# Altium PCB LAPPA-2020.PcbDoc
Units mm, origin at the board's own origin, x right, y up, seen from the top; angles counter-clockwise.
Board outline 53 x 34 mm, 4 copper layers (Top, Ground Plane, Power Plane, Bottom), stack 0.983 mm thick; 75 components, 53 nets, 317 pads, 178 vias.
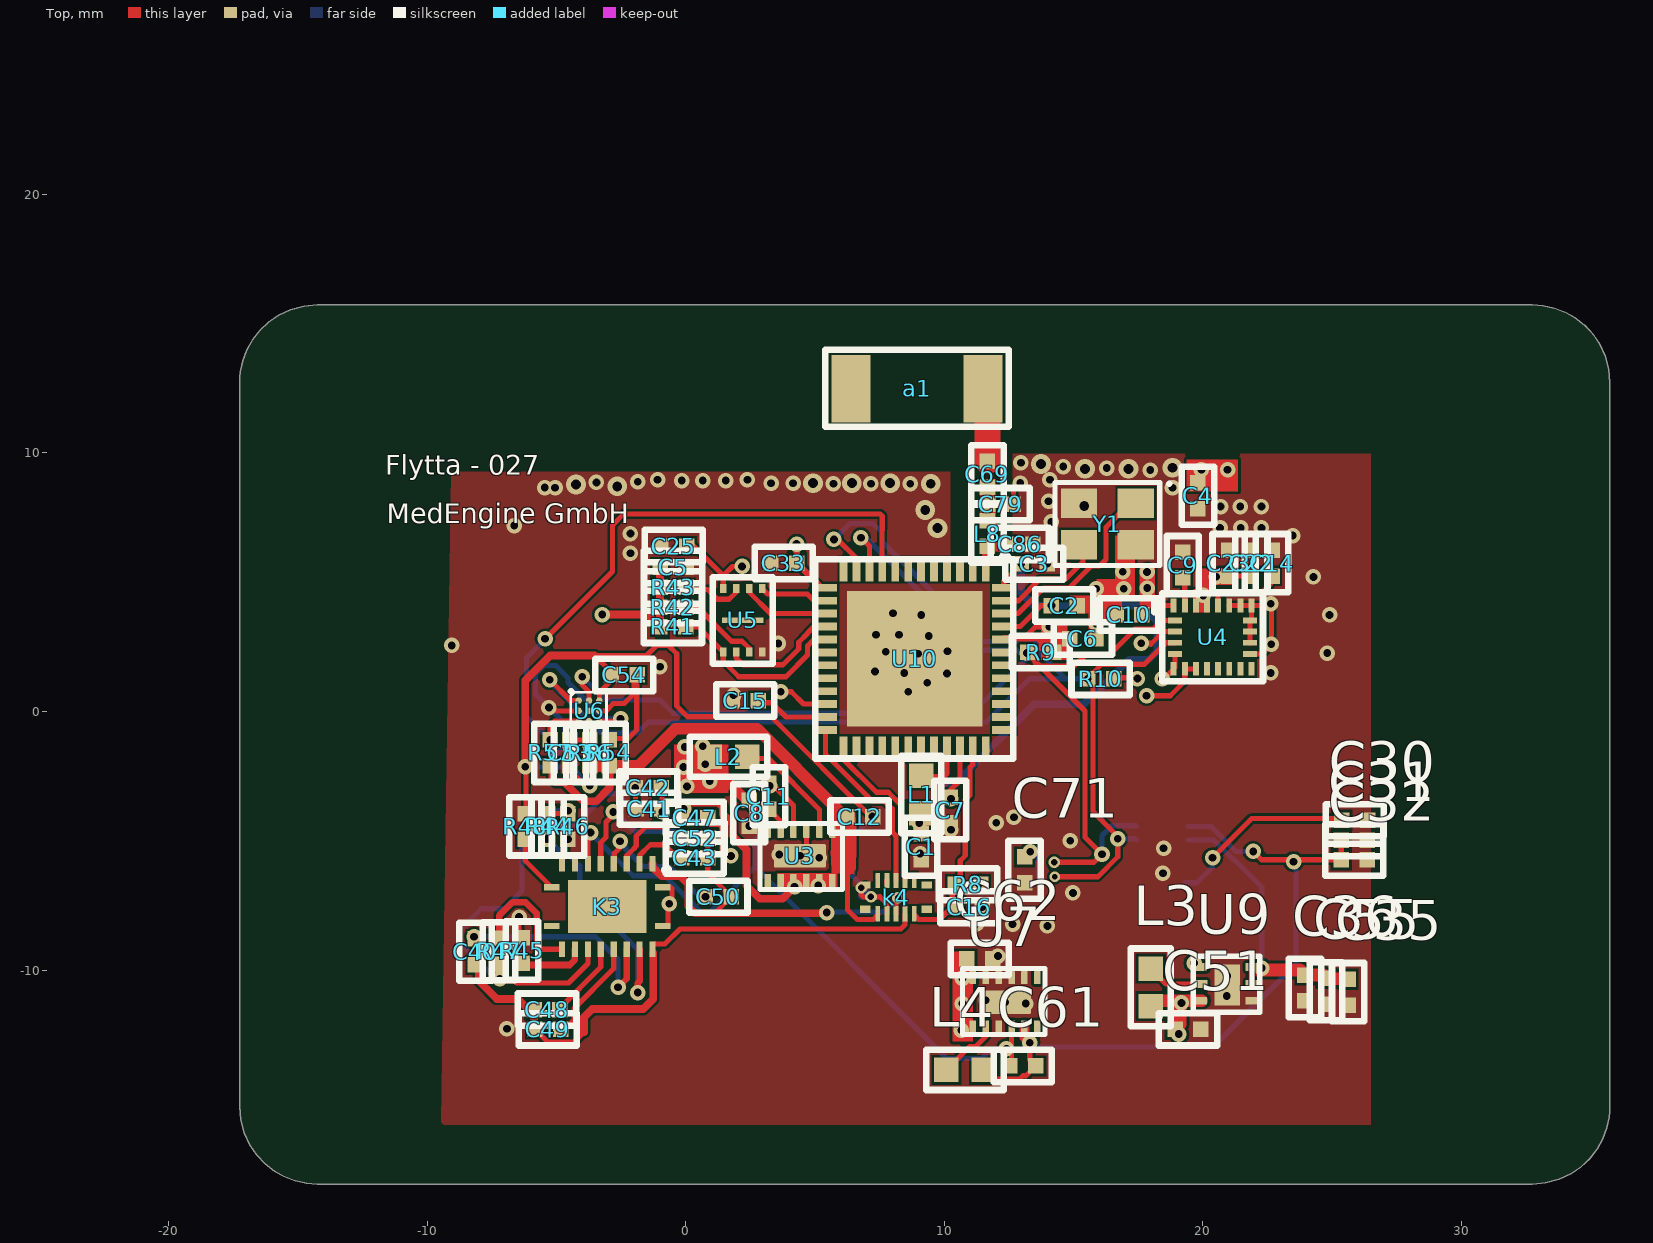
[diagram p0: Top view]
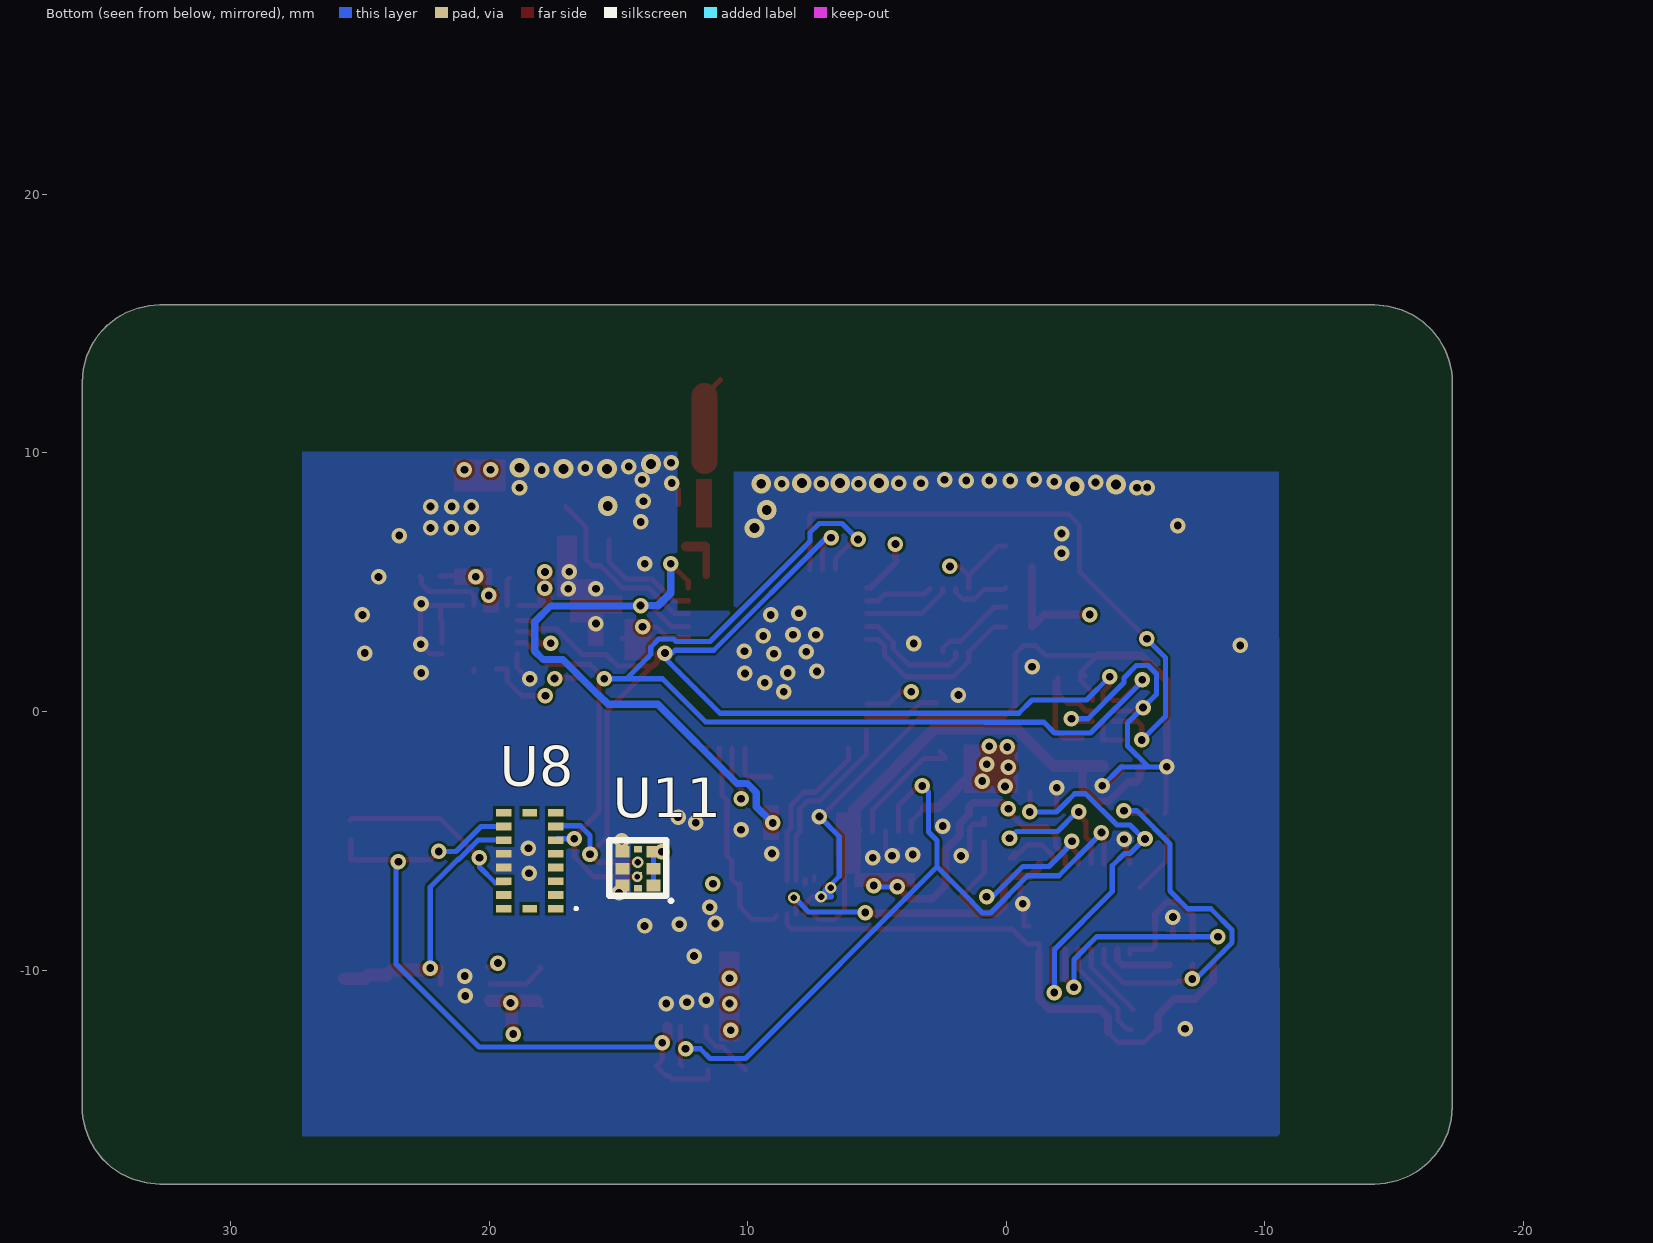
[diagram p1: Bottom view, seen from below]
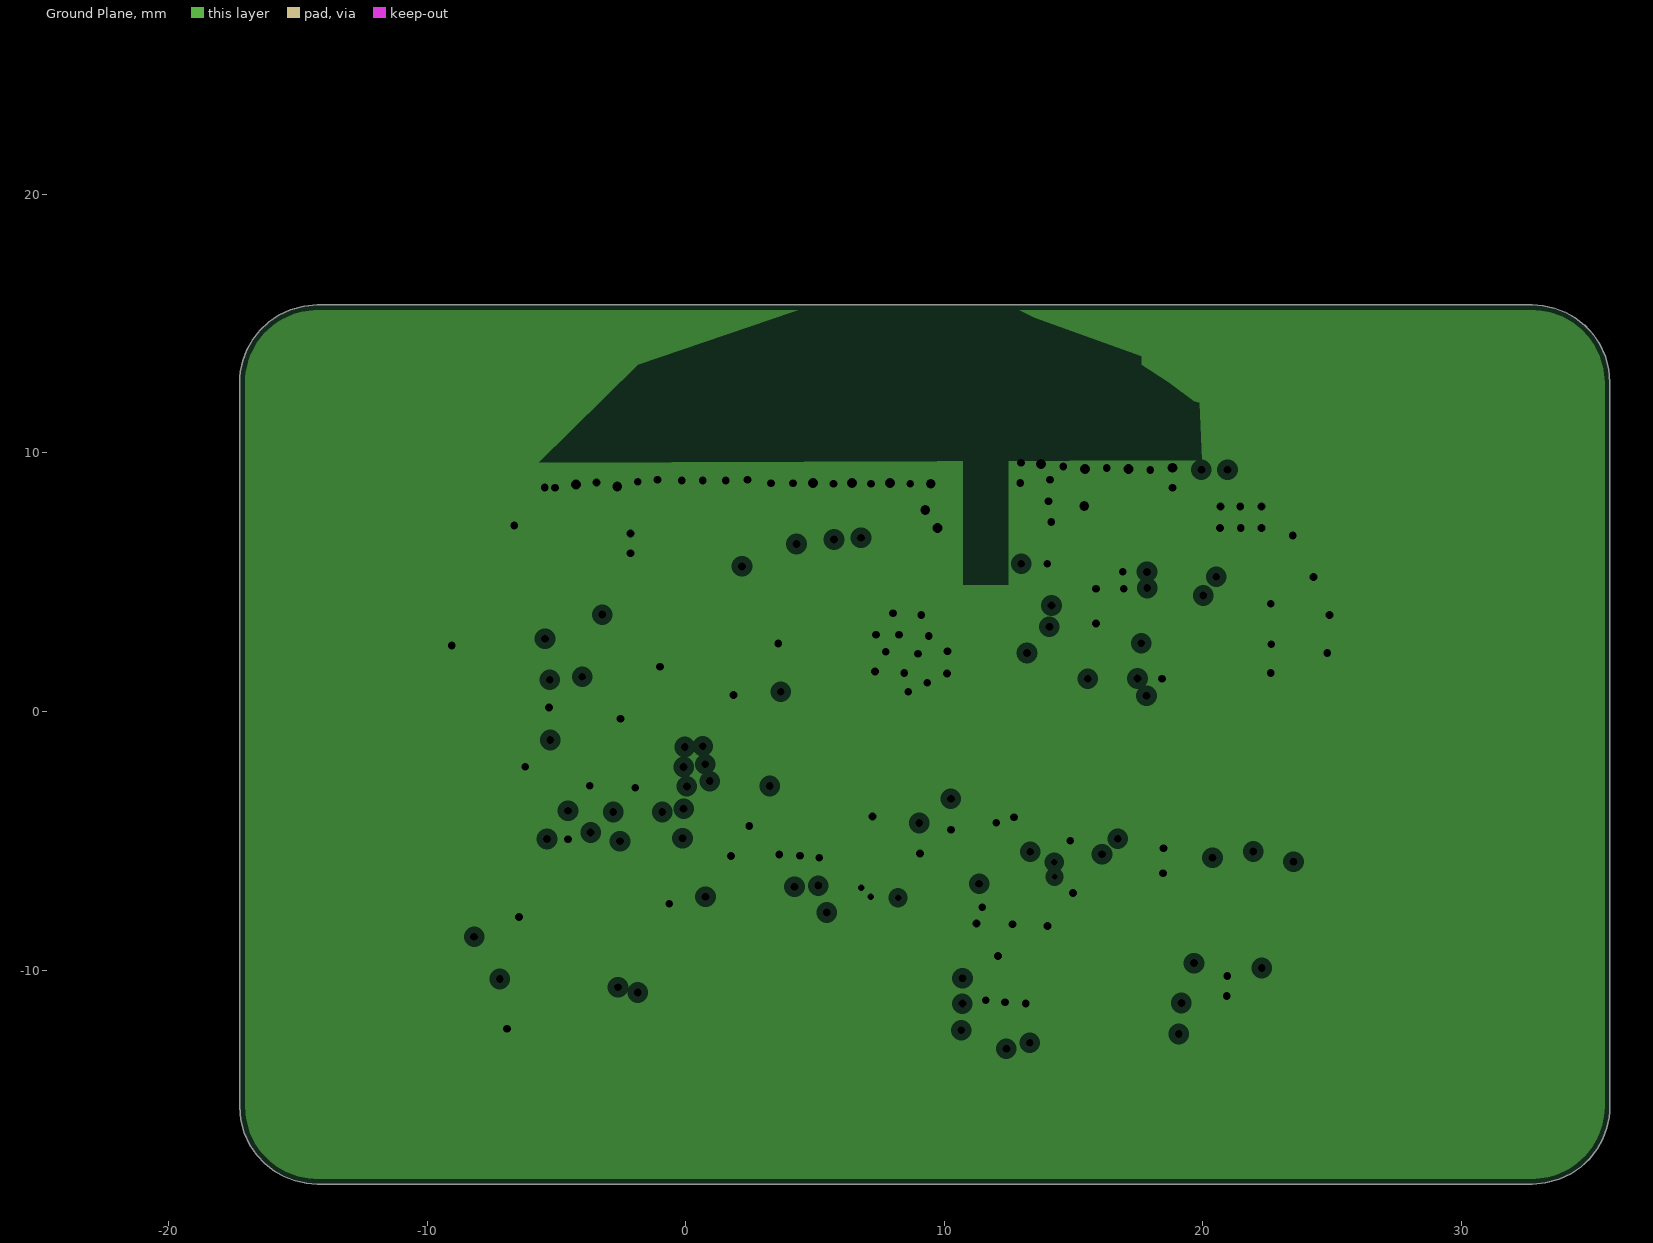
[diagram p2: Ground Plane, clearances drawn from the general rule]
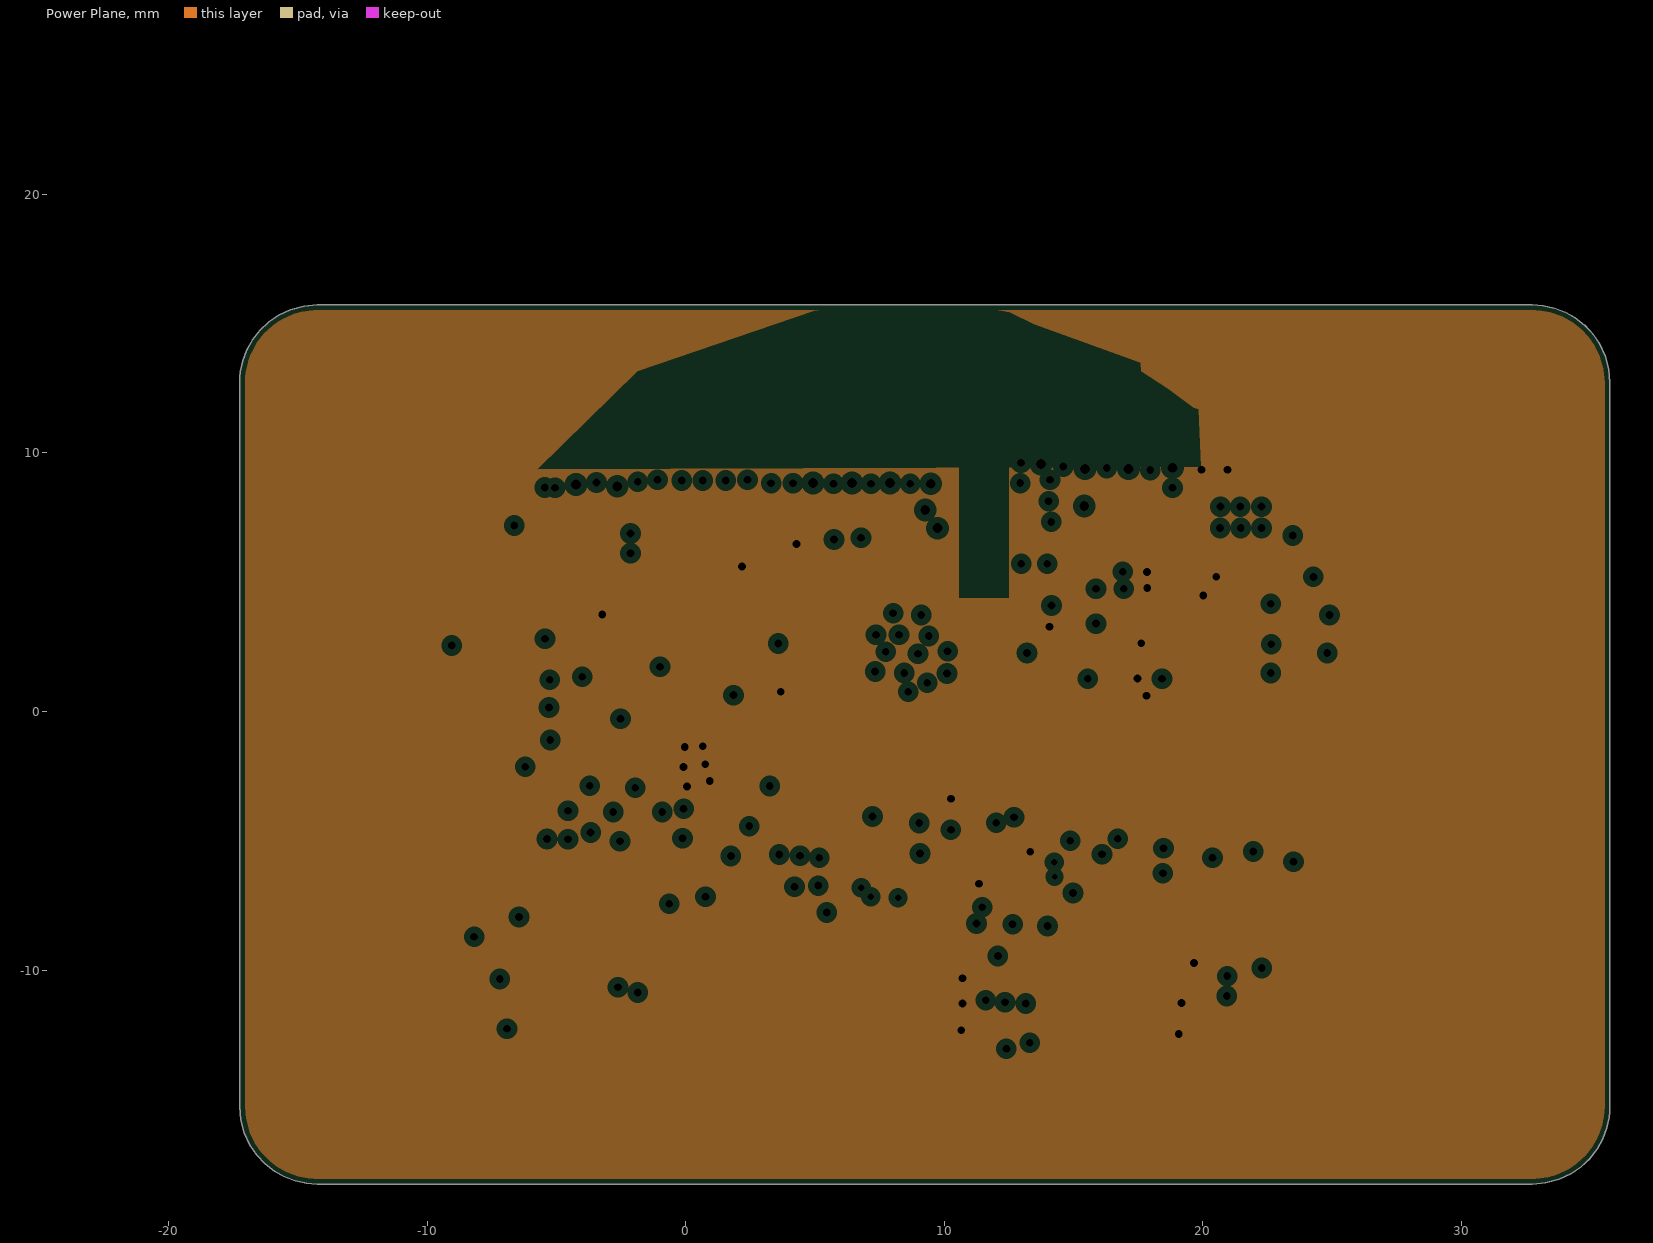
[diagram p3: Power Plane, clearances drawn from the general rule]
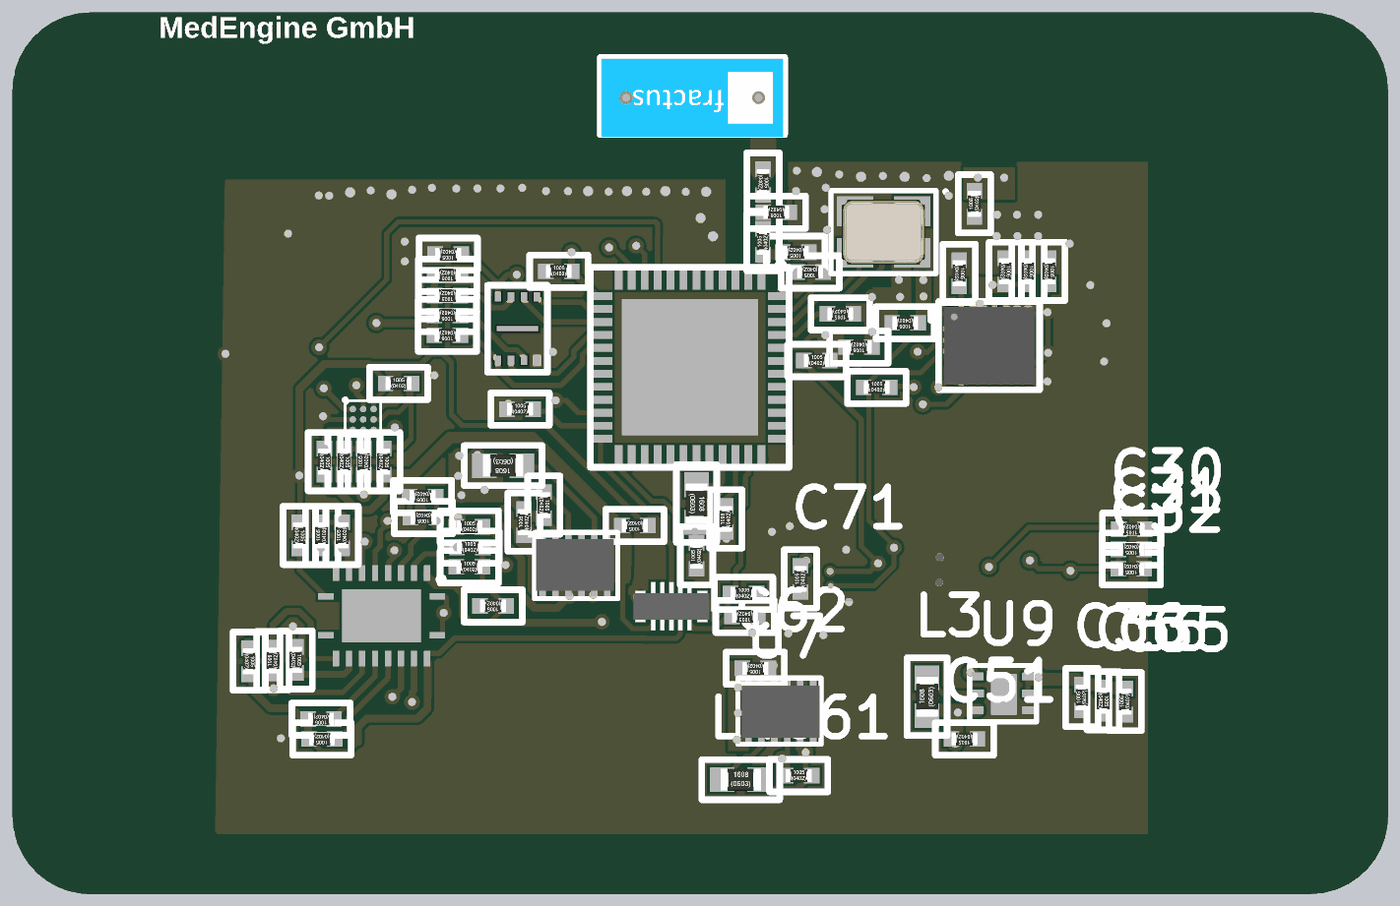
[diagram p4: 3D render of the assembled board from above, using the file's embedded part models]

## Layer stack, top to bottom
Top Solder: solder mask 0.0102, Solder Resist, Dk 3.5
Top: signal copper 0.0356
Dielectric 1: core 0.32, FR-4, Dk 4.4
Ground Plane: plane copper 0.036, net GND
Dielectric 3: prepreg 0.2, FR-4, Dk 4.4
Power Plane: plane copper 0.036, net VDD
Dielectric 4: core 0.32, FR-4, Dk 4.4
Bottom: signal copper 0.0356
Bottom Solder: solder mask 0.0102, Solder Resist, Dk 3.5

## Board outline
32.752,-18.276 -14.248,-18.276 -14.452,-18.269 -14.66,-18.247 -15.081,-18.158 -15.5,-18.002 -15.901,-17.779 -16.269,-17.492 -16.59,-17.151 -16.851,-16.767 -17.064,-16.31 -17.204,-15.787 -17.248,-15.276 -17.248,12.724 -17.241,12.928 -17.219,13.137 -17.129,13.558 -16.974,13.977 -16.751,14.378 -16.464,14.746 -16.123,15.066 -15.739,15.327 -15.282,15.54 -14.758,15.68 -14.248,15.724 32.752,15.724 32.956,15.717 33.165,15.696 33.586,15.606 34.005,15.45 34.406,15.227 34.774,14.941 35.094,14.599 35.355,14.216 35.568,13.758 35.709,13.235 35.752,12.724 35.752,-15.276 35.745,-15.48 35.724,-15.688 35.634,-16.109 35.478,-16.528 35.255,-16.93 34.969,-17.298 34.627,-17.618 34.244,-17.879 33.787,-18.092 33.263,-18.232

## Design rules (kind name [scope] priority, off if disabled: settings)
BoardOutlineClearance [OnLayer('Top')] p1: gap=0.25 ignorepadtopadclearanceinfootprint=FALSE except(0: Arc-SplitContinuation Track-SplitContinuation SMDPad-SplitContinuation THPad-SplitContinuation Via-SplitContinuation Fill-SplitContinuation Poly-SplitContinuation Region-SplitContinuation Text-SplitContinuation)
BoardOutlineClearance BoardOutlineClearance_1 [OnLayer('Bottom')] p2: gap=0.25 ignorepadtopadclearanceinfootprint=FALSE except(0: Arc-SplitContinuation Track-SplitContinuation SMDPad-SplitContinuation THPad-SplitContinuation Via-SplitContinuation Fill-SplitContinuation Poly-SplitContinuation Region-SplitContinuation Text-SplitContinuation)
Clearance [All] p1: gap=0.1 ignorepadtopadclearanceinfootprint=FALSE except(0: Arc-Hole Track-Hole SMDPad-Hole THPad-Hole Via-Hole Fill-Hole Poly-Hole Region-Hole Text-Hole; 0.15: THPad-THPad THPad-Via THPad-Fill THPad-Poly THPad-Region THPad-Text Text-Text)
ComponentClearance [All] p1: gap=0.25 collisioncheckmode=3 verticalgap=0.25 showdistances=FALSE
DiffPairsRouting [All] p1: maxlimit=0.25 minlimit=0.25 mostfreqgap=0.25 toplayer_minwidth=0.381 toplayer_maxwidth=0.381 toplayer_prefwidth=0.381 bottomlayer_minwidth=0.381 bottomlayer_maxwidth=0.381 bottomlayer_prefwidth=0.381 maxuncoupledlength=12.5
Height [All] p1: minheight=0 maxheight=25 prefheight=12.5
HoleSize HoleSize-PTH [All] p1: absolutevalues=TRUE maxlimit=2 minlimit=0.25 maxpercent=80.000 minpercent=20.000
HoleToHoleClearance [All] p1: gap=0.35 allowstackedmicrovias=TRUE
MinimumAnnularRing "Minimum IAR  >0.45mm" [((ObjectKind = 'Pad') OR (ObjectKind = 'Via')) And (Layer = 'MultiLayer') And (HoleDiameter > AsMM(0.45))] p1: minimumring=0.15 // minimum inner annular ring for pads > 0.45mm finished hole size
MinimumAnnularRing "Minimum IAR <=0.45mm" [((ObjectKind = 'Pad') OR (ObjectKind = 'Via')) And (Layer = 'MultiLayer') And (HoleDiameter <= AsMM(0.45))] p2: minimumring=0.15 // minimum inner annular ring for pads <= 0.45mm finished hole size
MinimumSolderMaskSliver [All] p1: minsoldermaskwidth=0.08
NetAntennae [All] p1 off: netantennaetolerance=0
PlaneClearance PlaneClearance-IPI [All] p1: clearance=0.25
PlaneConnect [All] p1: planeconnectstyle=Relief reliefexpansion=0.175 reliefentries=4 reliefconductorwidth=0.2 reliefairgap=0.2
PolygonConnect PolygonConnect-xTW [All] p1: connectstyle=Direct reliefconductorwidth=0.2 reliefentries=4 polygonreliefangle="90 Angle" airgapwidth=0.2
RoutingCorners [All] p1: cornerstyle=45-Degree minsetback=2.5 maxsetback=2.5
RoutingVias "RoutingVias > 0.45mm" [(ObjectKind = 'Via') And (HoleDiameter > AsMM(0.45))] p1: holewidth=0.5 width=0.85 viastyle="Through Hole" minholewidth=0.5 minwidth=0.85 maxholewidth=0.9 maxwidth=1.25 // finishet hole size > 0.45mm
RoutingVias "RoutingVias <= 0.45mm" [(ObjectKind = 'Via') And (HoleDiameter <= AsMM(0.45))] p2: holewidth=0.3 width=0.65 viastyle="Through Hole" minholewidth=0.25 minwidth=0.6 maxholewidth=0.45 maxwidth=0.8 // finishet hole size <= 0.45mm
ShortCircuit ShortCircuit_1 [InNet('NetAE1_1') vs InNet('GND')] p1: allowed=TRUE
ShortCircuit [All] p2: allowed=FALSE
SilkToSilkClearance [All] p1: silktosilkclearance=0.2
SilkToSolderMaskClearance SilkscreenOverComponentPads [IsPad] p1 off: minsilkscreentomaskgap=0.3 clearancetoexposedcopper=TRUE
SolderMaskExpansion [All] p1: expansion=0 istentingtop=FALSE
UnRoutedNet [All] p1: checkbadconnections=TRUE
Width Width-xTW [All] p1: maxlimit=1.5 minlimit=0.15 preferedwidth=0.2
16 further rules are at their usual default settings.

## Components (designator, comment, footprint, x,y, rotation, side; value= is the part's Value field where it differs from the comment)
a1 "fractus-slim-extend" fractus-chip-antenna 8.952,12.487 r180 top
C1 "10UF" "Passive (0402, 1005)" 9.109,-5.232 r90 top
C2 "100NF" "Passive (0402, 1005)" 14.65,4.098 r180 top
C3 "100NF" "Passive (0402, 1005)" 13.487,5.715 r180 top
C4 "22UF" "Passive (0402, 1005)" 19.818,8.344 r90 top
C5 "100NF" "Passive (0402, 1005)" -0.483,5.588 r180 top
C6 "100NF" "Passive (0402, 1005)" 15.367,2.819 r180 top
C7 "10UF" "Passive (0402, 1005)" 10.236,-3.81 r90 top
C8 "100NF" "Passive (0402, 1005)" 2.464,-3.929 r90 top
C9 "100NF" "Passive (0402, 1005)" 19.228,5.664 r270 top
C10 "100NF" "Passive (0402, 1005)" 17.15,3.75 r180 top
C11 "10UF" "Passive (0402, 1005)" 3.226,-3.277 r270 top
C12 "10UF" "Passive (0402, 1005)" 6.731,-4.064 r180 top
C14 "10NF" "Passive (0402, 1005)" 22.682,5.74 r270 top
C15 "1UF" "Passive (0402, 1005)" 2.311,0.425 r0 top
C16 "100NF" "Passive (0402, 1005)" 10.973,-7.569 r180 top
C22 "100NF" "Passive (0402, 1005)" 21.882,5.74 r270 top
C23 "10UF" "Passive (0402, 1005)" 21.006,5.74 r270 top
C25 "100NF" "Passive (0402, 1005)" -0.457,6.401 r180 top
C30 "1UF" "Passive (0402, 1005)" 25.879,-4.207 r180 top
C31 "0.1UF" "Passive (0402, 1005)" 25.863,-4.978 r180 top
C32 "4.7UF" "Passive (0402, 1005)" 25.863,-5.733 r180 top
C33 "100NF" "Passive (0402, 1005)" 3.802,5.74 r0 top
C35 "0.1UF" "Passive (0402, 1005)" 25.627,-10.853 r90 top
C36 "10UF" "Passive (0402, 1005)" 23.957,-10.695 r90 top
C40 "0.01UF" "Passive (0402, 1005)" -8.128,-9.296 r270 top
C41 "0.022UF" "Passive (0402, 1005)" -1.412,-3.759 r180 top
C42 "4.7UF" "Passive (0402, 1005)" -1.448,-2.946 r180 top
C43 "0.01UF" "Passive (0402, 1005)" 0.356,-5.658 r0 top
C47 "4.7UF" "Passive (0402, 1005)" 0.356,-4.115 r0 top
C48 "0.022UF" "Passive (0402, 1005)" -5.359,-11.532 r180 top
C49 "0.47UF" "Passive (0402, 1005)" -5.326,-12.294 r180 top
C50 "0.47UF" "Passive (0402, 1005)" 1.27,-7.163 r180 top
C51 "2.2UF" "Passive (0402, 1005)" 19.433,-12.294 r180 top
C52 "0.022UF" "Passive (0402, 1005)" 0.381,-4.902 r0 top
C53 "10NF" "Passive (0402, 1005)" -4.47,-1.6 r270 top
C54 "1UF" "Passive (0402, 1005)" -2.37,1.416 r0 top
C55 "4.7UF" "Passive (0402, 1005)" 24.775,-10.817 r270 top
C61 "10UF" "Passive (0402, 1005)" 13.046,-13.707 r0 top
C62 "10UF" "Passive (0402, 1005)" 11.375,-9.569 r180 top
C69 "12pF" "Passive (0402, 1005)" 11.674,9.18 r270 top
C71 "6.8PF" "Passive (0402, 1005)" 13.112,-6.121 r90 top
C79 "1pF" "Passive (0402, 1005)" 12.182,8.019 r180 top
C86 "6.8PF" "Passive (0402, 1005)" 12.932,6.476 r180 top
K3 "BQ51051 - VQFN" "bq51051 - vqfn" -3.196,-7.555 r270 top
k4 "BM15FR0.8-10DP-0.35V(53)" BM15-Header 8.052,-7.163 r0 top
L1 "10uH" "Passive (0603, 1608)" 9.109,-3.215 r270 top value=10mH
L2 "10uH" "Passive (0603, 1608)" 1.657,-1.753 r180 top value=10mH
L3 "1UH" "Passive (0603, 1608)" 17.993,-10.666 r90 top value=10mH
L4 "10uH" "Passive (0603, 1608)" 10.814,-13.863 r0 top value=10mH
L8 "2nH" "Passive (0402, 1005)" 11.674,6.883 r90 top value=10mH
R8 "102K" "Passive (0402, 1005)" 10.922,-6.68 r0 top
R9 "4.7K" "Passive (0402, 1005)" 13.741,2.3 r0 top
R10 "4.7K" "Passive (0402, 1005)" 16.053,1.264 r0 top
R41 "2.2K" "Passive (0402, 1005)" -0.49,3.275 r180 top
R42 "2.2K" "Passive (0402, 1005)" -0.49,4.039 r180 top
R43 "2.2K" "Passive (0402, 1005)" -0.483,4.801 r180 top
R44 "100K" "Passive (0402, 1005)" -5.334,-4.445 r90 top
R45 "10K" "Passive (0402, 1005)" -6.325,-9.246 r270 top
R46 "140" "Passive (0402, 1005)" -4.549,-4.445 r90 top
R47 "3.83K" "Passive (0402, 1005)" -7.214,-9.271 r90 top
R48 "2.43K" "Passive (0402, 1005)" -6.198,-4.445 r270 top
R54 "1K" "Passive (0402, 1005)" -2.946,-1.6 r270 top
R56 "150" "Passive (0402, 1005)" -3.709,-1.6 r90 top
R57 "4.7K" "Passive (0402, 1005)" -5.232,-1.6 r270 top
U3 "TPS6274X" TPS6274 4.424,-5.583 r270 top
U4 "LSM9DS1" LSM9DS1 20.383,2.875 r0 top
U5 "W25X40CLUXIGCT-ND" "USON 2x3" 1.46,2.306 r90 top
U6 "MAX17043" MAX17043 -4.134,0.425 r0 top
U7 "TPS6274X" TPS6274 12.357,-11.245 r90 top
U8 "MAX86160" MAX86160 18.452,-5.753 r0 bottom
U9 "TPS61241" TPS61241 33.432,-8.099 r180 top
U10 "CC2640R2FRGZR" CC2640R2FRGZR 8.897,1.882 r270 top
U11 "MAX30208" MAX30208 13.652,-6.73 r0 bottom
Y1 "24MHz crystal" TSX-3225 17.415,8.052 r180 top

## Footprints (in the part's own frame and the unit in brackets; to place one, negate y for a bottom-side part, rotate by r counter-clockwise, add the part's x,y. Pads: shape width x height; smd on the part's side, far side on the other; paste and mask are expansions set on the pad)
BM15-Header [mm]
  rect 0.18x0.59 smd: 1(-0.613,-0.664) 2(-0.613,0.626) 3(-0.263,-0.664) 4(-0.263,0.626) 5(0.087,-0.664) 6(0.087,0.626) 7(0.437,-0.664) 8(0.437,0.626) 9(0.787,-0.664) 10(0.787,0.626)
  rect 0.415x0.28 smd: 11(-1.105,0.451) 12(-1.105,-0.489) 13(1.279,-0.489) 14(1.279,0.451)
  body extent -1.37,-0.94 1.55,0.9, height 0.82
"bq51051 - vqfn" [mm]
  rect 0.24x0.6 smd: 1(-0.76,2.318) 10(-0.76,-1.982) 11(0.74,-1.982) 20(0.74,2.318)
  rect 0.6x0.24 smd: 2(-1.66,1.918) 3(-1.66,1.418) 4(-1.66,0.918) 5(-1.66,0.418) 6(-1.66,-0.082) 7(-1.66,-0.582) 8(-1.66,-1.082) 9(-1.66,-1.582) 12(1.64,-1.582) 13(1.64,-1.082) 14(1.64,-0.582) 15(1.64,-0.082) 16(1.64,0.418) 17(1.64,0.918) 18(1.64,1.418) 19(1.64,1.918)
  rect 2.05x3.05 smd: 21(-0.01,0.168)
  silkscreen extent -1.53,2.35 -1.33,2.57, body extent -2.11,-2.46 2.06,2.76, height 0.52
CC2640R2FRGZR [mm]
  rect 0.9x0.3 smd: 1(-3.605,2.713) 2(-3.605,2.213) 3(-3.605,1.713) 4(-3.605,1.213) 5(-3.605,0.713) 6(-3.605,0.213) 7(-3.605,-0.287) 8(-3.605,-0.787) 9(-3.605,-1.287) 10(-3.605,-1.787) 11(-3.605,-2.287) 12(-3.605,-2.787) 25(3.295,-2.787) 26(3.295,-2.287) 27(3.295,-1.787) 28(3.295,-1.287) 29(3.295,-0.787) 30(3.295,-0.287) 31(3.295,0.213) 32(3.295,0.713) 33(3.295,1.213) 34(3.295,1.713) 35(3.295,2.213) 36(3.295,2.713)
  rect 0.3x0.9 smd: 13(-2.905,-3.487) 14(-2.405,-3.487) 15(-1.905,-3.487) 16(-1.405,-3.487) 17(-0.905,-3.487) 18(-0.405,-3.487) 19(0.095,-3.487) 20(0.595,-3.487) 21(1.095,-3.487) 22(1.595,-3.487) 23(2.095,-3.487) 24(2.595,-3.487) 37(2.595,3.413) 38(2.095,3.413) 39(1.595,3.413) 40(1.095,3.413) 41(0.595,3.413) 42(0.095,3.413) 43(-0.405,3.413) 44(-0.905,3.413) 45(-1.405,3.413) 46(-1.905,3.413) 47(-2.405,3.413) 48(-2.905,3.413)
  rect 5.25x5.25 smd: 49(-0.155,-0.037)
  silkscreen extent -4.18,-3.88 3.7,3.78, body extent -3.32,-3.33 3.22,3.21, height 0.5
fractus-chip-antenna [mm]
  rect 1.5x2.6 smd: 1(-2.55,0) 2(2.55,0)
  silkscreen extent -3.55,-1.5 3.55,1.48, body extent -3.5,-1.45 3.5,2.01, height 2.2
LSM9DS1 [mm] "LGA 24 Pin"
  rect 0.23x0.53 smd mask+0.05: 1(-1.505,1.225) 6(-1.505,-1.225) 7(-1.075,-1.225) 8(-0.645,-1.225) 9(-0.215,-1.225) 10(0.215,-1.225) 11(0.645,-1.225) 12(1.075,-1.225) 13(1.505,-1.225) 18(1.505,1.225) 19(1.075,1.225) 20(0.645,1.225) 21(0.215,1.225) 22(-0.215,1.225) 23(-0.645,1.225) 24(-1.075,1.225)
  rect 0.53x0.23 smd mask+0.05: 2(-1.45,0.645) 3(-1.45,0.215) 4(-1.45,-0.215) 5(-1.45,-0.645) 14(1.45,-0.645) 15(1.45,-0.215) 16(1.45,0.215) 17(1.45,0.645)
  silkscreen extent -2.25,-1.7 1.95,1.7, body extent -2.7,-1.5 1.75,1.55, height 0.87
MAX17043 [mm]
  round 0.25 smd mask+0: A1(0,0) A2(0.4,0) A3(0.8,0) B1(0,-0.4) B2(0.4,-0.4) B3(0.8,-0.4) C1(0,-0.8) C2(0.4,-0.8) C3(0.8,-0.8)
  silkscreen extent -0.3,-1.05 1.07,0.36, body extent -0.3,-1.05 1.07,0.35, height 0.51
MAX30208 [mm]
  rect 0.55x0.45 smd mask+0.05: 1(0,0) 2(0,-1.3) 3(0,-0.65) 4(1.2,-1.3) 5(1.2,-0.65) 6(1.2,0)
  rect 0.3x0.25 smd mask+0.05: 7(0.6,0.1) 8(0.6,-0.4) 9(0.6,-0.9) 10(0.6,-1.4)
  silkscreen extent -0.69,-1.75 1.7,0.59, body extent -0.49,-1.75 1.7,0.4, height 0.5
MAX86160 [mm]
  rect 0.6x0.3 smd: 1(-1.012,1.872) 2(-1.012,1.342) 3(-1.012,0.812) 4(-1.012,0.282) 5(-1.012,-0.248) 6(-1.012,-0.778) 7(-1.012,-1.308) 8(-1.012,-1.838) 10(0.988,-1.838) 11(0.988,-1.308) 12(0.988,-0.778) 13(0.988,-0.248) 14(0.988,0.282) 15(0.988,0.812) 16(0.988,1.342) 17(0.988,1.872)
  rect 0.55x0.3 smd: 9(-0.012,-1.838) 18(-0.012,1.872)
  silkscreen extent -1.86,1.82 -1.76,1.92, body extent -1.41,-2.13 1.39,2.17, height 1.65
"Passive (0402, 1005)" [mm]
  rect 0.6x0.6 smd: 1(-0.5,0) 2(0.5,0)
  silkscreen extent -1.12,-0.63 1.12,0.63, body extent -0.5,-0.25 0.5,0.25, height 0.35
"Passive (0603, 1608)" [mm]
  rect 0.95x0.95 smd: 1(-0.725,0) 2(0.725,0)
  silkscreen extent -1.5,-0.77 1.5,0.77, body extent -0.78,-0.43 0.77,0.42, height 0.45
TPS6274 [mm] "STEP DOWN CONVERTER"
  rrect10% 0.5x0.25 smd paste+0 mask+0: 1(-0.95,1.25) 2(-0.95,0.75) 3(-0.95,0.25) 4(-0.95,-0.25) 5(-0.95,-0.75) 6(-0.95,-1.25) 7(0.95,-1.25) 8(0.95,-0.75) 9(0.95,-0.25) 10(0.95,0.25) 11(0.95,0.75) 12(0.95,1.25)
  rrect10% 0.9x2 smd paste+0 mask+0: 3(0,0)
  silkscreen extent -1.25,-1.55 1.3,1.65, body extent -1,-1.5 1,1.5, height 0.8
TPS61241 [mm]
  rrect10% 0.45x0.3 smd paste+0 mask+0: 1(11.55,3.087) 2(11.55,2.437) 3(11.55,1.783) 4(13.48,1.783) 5(13.47,2.436) 6(13.48,3.087)
  rrect10% 1x1.6 smd paste+0 mask+0: 7(12.482,2.481)
  silkscreen extent 11.22,1.36 13.8,3.53, body extent 11.52,1.45 13.52,3.42, height 0.25
TSX-3225 [mm] "Epson TSX-3225 24MHz Crystal"
  rect 1.4x1.15 smd: 1(0,0) 2(2.2,0) 3(2.2,1.6) 4(0,1.6)
  silkscreen extent -1.3,-0.8 3.13,2.4, body extent -0.5,-0.45 2.7,2.05, height 0.6
"USON 2x3" [mm] "For Winbond W25X40CLUXIGCT-ND"
  rect 0.35x0.25 smd mask+0.05: 1(0,0) 2(0,-0.5) 3(0,-1) 4(0,-1.5) 5(2.45,-1.5) 6(2.45,-1) 7(2.45,-0.5) 8(2.45,0)
  rect 0.2x1.6 smd mask+0.05: 10(1.225,-0.75)
  silkscreen extent -0.46,-1.91 2.9,0.41, body extent -0.33,-1.78 2.77,0.28, height 0.55

## Part data
a1: library part fractus-chip-antenna, "fractus ti chip antenna"
C1 C2 C3 C4 C5 C6 C7 C8 C9 C10 C11 C12 C14 C15 C16 C22 C23 C25 C30 C31 C32 C33 C35 C36 C40 C41 C42 C43 C47 C48 C49 C50 C51 C52 C53 C54 C55 C61 C62 C69 C71 C79 C86: library part Capacitor, "Ceramic chip capacitor"
k4: library part bm15
L1 L2 L3 L4 L8: library part Inductor, "Inductor", Code_IEC=1005, Code_JEITA=0402, LatestRevisionDate=29-May-2009, LatestRevisionNote="IPC-7351 Footprint Added.", PackageDescription="Chip Inductor", PackageReference=0402-A, Published=8-Jun-2000, Publisher="Altium Limited"
R8 R9 R10 R41 R42 R43 R44 R45 R46 R47 R48 R54 R56 R57: library part Resistor, "Resistor"
U3 U7: "Step down converter"
U4: "9DOF, Accel, Gyro, Mag", Package="QFN-20 Microchip", Availability=Good, MF=Microchip, MP=MCP73871-3CAI/ML, Price="1.56 USD"
U6: "I2C battery gauge"
Y1: library part TSX-3225

## Via types
v1: diameter 0.6, hole 0.3, Top to Bottom, tented both sides, 160 vias
v2: diameter 0.762, hole 0.381, Top to Bottom, tented both sides, 13 vias
v3: diameter 0.45, hole 0.25, Top to Bottom, tented both sides, 4 vias
v4: diameter 0.4, hole 0.2, Top to Bottom, tented both sides, 1 vias

## Nets (pads, with @x,y where several pads share a name; then routed paths per layer and width w, separated by ;. In a path a pad name is that pad's centre, name@x,y a point inside that pad or via, vN(x,y) a via of type N, cw(c..) or ccw(c..) an arc to the next point about the centre after c; other vN are vias at no path point)
1V8: C31.2 C32.2 C61.2 L4.2 U7.5 U8.11 | length 27.1
  Top w0.2: L4.2 11.539,-14.207 12.929,-14.207 13.046,-14.09 13.163,-14.09 C61.2 13.312,-13.474 v1(13.312,-12.812) v1@13.107,-12.607 ; v1(21.954,-5.414) 22.274,-5.733 C32.2 C31.2
  Top w0.4: v1@13.107,-12.607 U7.5
  Bottom w0.2: v1(13.312,-12.812) 13.476,-12.975 20.398,-12.975 23.605,-9.768 v1@23.605,-5.827 ; U8.11 20.325,-4.445 21.293,-5.414 v1(21.954,-5.414)
  other v1: 23.514,-5.807
3V3_PG: U3.7
3V3_SCLK: R9.1 U4.2 U6.A2 U8.7 U10.10 U11.9 | length 49.8
  Top w0.2: v1(-3.999,1.345) -3.999,1.027 -3.734,0.762 U6.A2 ; v1(6.782,6.724) 7.109,6.396 U10.10 ; R9.1@13.041,2.1 R9.1 13.241,2.226 13.51,1.957 ; R9.1@13.288,2.253 13.391,2.356 13.51,2.237 13.51,1.957 ; v3(14.252,-5.83) 15.801,-5.83 v1(16.106,-5.525) ; v1@16.11,-5.521 15.453,-4.864 15.453,0.014 13.707,1.76 ; U4.2@18.933,3.518 18.416,3.518 18.09,3.192 17.392,3.192 16.408,2.208 15.483,2.208 15.035,1.76 13.707,1.76 ; 13.51,1.957 13.51,1.901 13.651,1.76 13.707,1.76 ; 13.51,1.957 13.707,1.76
  Bottom w0.2: v1(-3.999,1.345) -3.103,0.448 -2.092,0.448 ; -2.091,0.448 -0.991,0.448 -0.476,-0.067 11.083,-0.067 v1@13.208,2.058 ; v1@6.629,6.731 6.96,6.731 11.322,2.369 12.816,2.369 v1@13.108,2.077 ; v1(16.106,-5.525) 16.106,-4.796 16.483,-4.419 17.414,-4.419 U8.7
  other v1: 13.208,2.261
3V3_SDA: R10.1 U4.4 U6.A1 U8.6 U10.11 U11.8 | length 52.4
  Top w0.2: v1(-5.252,1.225) -4.452,0.425 U6.A1 ; v1(5.74,6.655) 5.88,6.655 6.609,5.926 U10.11 ; v4(14.276,-6.391) 15.947,-6.391 16.717,-5.621 v1(16.717,-4.919) ; R10.1@15.491,1.203 v1(15.553,1.264) 15.753,1.064 15.753,-3.87 v1@16.563,-4.68 ; R10.1@15.55,1.275 16.1,1.825 17.004,1.825 ; 17.05,1.825 17.004,1.825 ; U4.4 18.583,2.658 17.75,1.825 17.004,1.825
  Bottom w0.2: v1(-5.252,1.225) -5.252,1.166 -3.256,-0.829 -1.861,-0.829 -1.449,-0.417 0.833,-0.417 0.843,-0.407 11.626,-0.407 13.298,1.264 14.698,1.264 ; v1(5.74,6.655) 6.361,7.276 7.238,7.276 7.603,6.911 7.603,6.572 7.926,6.25 7.926,6.246 11.462,2.709 12.777,2.709 12.879,2.811 13.436,2.811 13.758,2.488 13.758,2.205 14.698,1.264 ; v1(15.553,1.264) 14.698,1.264 ; v1(16.717,-4.919) 17.384,-4.919 U8.6
5V: C35.2 C36.2 C55.1 U8.12 U9.2 U9.3 | length 11.3
  Top w0.2: U9.2@21.872,-10.533 21.877,-10.528 21.877,-9.887 U9.3 21.957,-9.882 U9.3@22.07,-9.995 ; C36.2@23.757,-9.995 C36.2 ; C55.1@24.676,-10.195 C55.1@24.816,-10.335 ; C35.2@25.609,-10.335 C35.2
  Top w0.5: U9.3@22.07,-9.995 C36.2@23.757,-9.995 ; C36.2 C55.1@24.676,-10.195 ; C55.1@24.816,-10.335 C35.2@25.609,-10.335
  Bottom w0.2: U8.12 20.431,-4.975 21.169,-5.714 21.213,-5.714 22.286,-6.786 v1(22.286,-9.921)
AC1: C43.2 C50.1 C52.2 K3.2 k4.5 | length 15.3
  Top w0.2: C52.2@0.856,-5.029 C43.2 0.856,-6.248 C50.1 1.127,-7.806 1.118,-7.815 1.118,-7.806 ; k4.5@8.14,-7.826 8.14,-7.202 8.145,-7.197 v3(8.218,-7.197)
  Top w0.3: K3.2 -1.278,-6.015 -0.918,-6.375 -0.205,-6.375 0.102,-6.681 0.102,-7.545 0.363,-7.806 1.118,-7.806 1.127,-7.806 v1@5.461,-7.806
  Bottom w0.2: v1(5.461,-7.775) 5.486,-7.75 7.645,-7.75 8.198,-7.197 v3(8.218,-7.197)
AC2: C40.2 C48.2 C49.2 K3.19 k4.7 | length 22.2
  Top w0.198: 8.323,-8.415 8.489,-8.25 k4.7
  Top w0.2: C49.2 -5.326,-12.794 -4.316,-12.794 -3.929,-12.407 ; K3.19 -1.278,-9.015 -1.258,-8.995 -0.805,-8.995 -0.219,-8.409 5.317,-8.409 8.323,-8.415
  Top w0.3: C40.2@-8.001,-9.796 -8.001,-10.414 -7.299,-11.116 -6.487,-11.116 -5.859,-11.743 C49.2@-5.859,-12.327 ; -3.929,-12.407 -3.929,-11.829 -3.607,-11.506 -1.641,-11.506 -1.254,-11.12 -1.254,-10.668 -1.249,-10.664 K3.19@-1.249,-9.345
BOOT1: C43.1 K3.3 | length 2.6
  Top w0.2: K3.3 -1.778,-5.572 -1.363,-5.156 -0.819,-5.156 -0.317,-5.658 C43.1 C43.1@-0.35,-5.452
BOOT2: C40.1 K3.17 | length 8.6
  Top w0.254: v1(-2.61,-10.668) -2.278,-10.336 K3.17
  Bottom w0.2: v1(-8.179,-8.712) -8.177,-8.714 -6.173,-8.714 -6.172,-8.712 -3.489,-8.712 -2.61,-9.591 v1(-2.61,-10.668)
CHG: C11.1 C61.1 K3.7 U3.4 U7.4 | length 29.5
  Top w0.2: K3.7 -3.778,-4.896 -3.672,-4.79 v1(-3.672,-4.682) ; v1(3.251,-2.878) 3.419,-2.878 4.174,-3.633 U3.4 ; C61.1 12.607,-13.646 U7.4
  Bottom w0.2: v1@-3.48,-4.893 -2.022,-6.35 -0.821,-6.35 0.618,-7.789 0.922,-7.789 1.32,-7.391 1.32,-7.367 2.681,-6.006 ; v1(3.251,-2.878) 3.014,-3.115 3.014,-4.66 2.681,-4.993 2.681,-6.006 ; v1(12.409,-13.046) 11.84,-13.046 11.464,-13.423 10.098,-13.423 2.681,-6.006
CLMP1: C50.2 K3.5 | length 5.3
  Top w0.2: K3.5 -2.758,-5.875 -2.758,-5.495 -2.533,-5.27 v1(-2.533,-5.022)
  Bottom w0.2: v1@-2.537,-5.058 -2.311,-5.283 -2.362,-5.283 -1.651,-5.994 -0.635,-5.994 0.533,-7.163 v1(0.77,-7.163)
CLMP2: C49.1 K3.16 | length 4
  Top w0.2: C49.1 -4.682,-12.294 -4.319,-11.931 -4.319,-11.482 -2.778,-9.941 K3.16
COM1: C52.1 K3.6 | length 5.3
  Top w0.2: K3.6 -3.278,-5.066 -3.073,-4.861 -3.073,-4.274 -2.769,-3.969 -2.794,-3.944 v1(-2.794,-3.886)
  Bottom w0.2: v1@-2.737,-3.87 -1.971,-4.636 -0.385,-4.636 v1(-0.119,-4.902)
COM2: C48.1 K3.15 | length 3.1
  Top w0.2: C48.1@-4.92,-11.532 C48.1 -4.859,-11.463 -3.278,-9.882 K3.15
DCDC_SW: L1.1 U10.33 | length 2
  Top w0.2: L1.1@9.109,-2.526 9.983,-2.526 10.109,-2.4 U10.33
FLASH_CS: R41.1 U5.1 U10.17 | length 7.2
  Top w0.2: R41.1 0.49,3.275 U5.1 1.46,1.945 2.059,1.346 3.881,1.346 4.719,2.184 4.719,2.536 4.86,2.676 4.964,2.781 U10.17@5.409,2.781
FLASH_MISO: U5.2 U10.16 | length 4.6
  Top w0.2: U5.2 1.96,2.075 2.225,1.81 3.768,1.81 4.379,2.421 4.379,2.677 4.719,3.016 4.719,3.036 4.97,3.286 U10.16
FLASH_MOSI: U5.5 U10.14 | length 2.6
  Top w0.2: U5.5 3.169,4.547 4.496,4.547 4.71,4.547 4.97,4.286 U10.14
FLASH_SCLK: U5.6 U10.15 | length 3.4
  Top w0.2: U5.6 2.46,4.616 3.29,3.786 U10.15
FOD: K3.14 R44.2 R46.2 R47.1 | length 15.7
  Top w0.2: R47.1 -7.185,-9.8 v1(-7.185,-10.344) -7.108,-10.42 -6.616,-10.42 -6.538,-10.499 -4.53,-10.499 -3.778,-9.747 K3.14 ; R44.2@-5.41,-3.818 -5.436,-3.843 R44.2 R46.2 ; R46.2@-4.562,-3.932 R46.2@-4.547,-3.916 ; R46.2@-4.554,-3.908 R46.2@-4.547,-3.901
  Bottom w0.2: v1(-7.185,-10.344) -7.325,-10.344 -8.729,-8.94 -8.729,-8.449 -7.906,-7.626 -7.017,-7.626 -6.33,-6.94 -6.33,-5.121 -5.045,-3.835 v1(-4.547,-3.835)
GND: C1.1 C2.1 C3.1 C4.1 C5.1 C6.1 C7.1 C8.1 C9.1 C10.2 C12.1 C14.1 C15.1 C16.1 C22.1 C23.1 C25.2 C30.1 C31.1 C32.1 C33.1 C35.1 C36.1 C41.2 C42.2 C47.2 C51.1 C53.2 C54.1 C55.2 C62.1 C71.1 C79.1 C86.1 K3.1 K3.9 K3.20 k4.3 k4.11 R45.1 R46.1 R48.1 U3.3 U4.5 U4.6 U4.14 U4.15 U4.16 U4.17 U4.18 U4.19 U4.20 U5.4 U6.A3 U6.B1 U6.C3 U7.3 U7.8 U7.9 U7.10 U7.11 U8.13 U8.14 U9.1 U9.7 U10.49 U11.4 U11.5 U11.6 Y1.2 Y1.4 | length 62.4
  Top w0.2: v1(-6.442,-7.95) -6.442,-8.469 -6.401,-8.511 -6.48,-8.59 R45.1 ; v1(-6.198,-2.134) -6.172,-2.159 -6.172,-3.894 R48.1@-6.121,-3.945 ; v1(-5.283,0.152) -5.156,0.025 U6.B1 ; K3.9 -4.778,-5.715 -4.648,-5.585 -4.648,-4.945 v1(-4.549,-4.945) ; C53.2 -4.47,-2.294 -3.894,-2.87 v1(-3.708,-2.87) ; U6.C3 -2.61,-0.375 v1(-2.515,-0.279) ; U6.A3 -3.334,0.742 -2.87,1.206 C54.1 ; C54.1@-3.037,1.372 -2.887,1.521 -2.887,1.534 -3.518,2.166 -1.508,2.166 -1.117,2.557 -0.661,2.557 -0.339,2.234 -0.339,0.212 0.078,-0.205 3.312,-0.205 C12.1@7.201,-4.094 ; C41.2@-1.94,-3.87 C42.2@-1.94,-3.099 ; K3.20 -0.698,-8.295 -0.678,-8.275 -0.678,-7.479 v1(-0.631,-7.432) -0.529,-7.33 -0.529,-6.858 K3.1@-0.592,-6.795 ; C47.2 0.856,-4.362 1.28,-4.362 1.421,-4.503 1.421,-5.352 1.657,-5.588 v1(1.753,-5.588) ; U3.3@4.174,-5.333 v1(4.424,-5.583) 4.674,-5.333 U3.3@4.674,-4.633 ; k4.11 7.01,-6.775 6.967,-6.819 v3(6.791,-6.819) 6.791,-7.091 6.869,-7.168 v3(7.169,-7.168) 7.499,-7.168 7.509,-7.158 7.743,-7.392 7.743,-7.393 7.789,-7.439 k4.3 ; C79.1 12.682,8.572 v1(12.944,8.834) ; v1(18.428,1.264) 18.492,1.264 U4.6 18.933,1.705 U4.5 ; U4.20 U4.19 U4.18 ; U4.14 22.287,2.23 v1(22.657,2.6) 22.657,4.14 v1(22.631,4.166) 22.566,4.1 U4.18 ; U4.15 U4.16 U4.17 21.888,3.575 U4.18
  Top w0.3: v1(-6.198,-2.134) -6.198,1.2 -5.232,2.166 -3.518,2.166
  Bottom w0.2: v1(-6.198,-2.134) -6.181,-2.15 -5.505,-2.15 ; v1(-3.708,-2.87) -4.428,-2.15 -5.505,-2.15 ; v1(-2.515,-0.279) -3.153,-0.279 -4.549,1.117 -4.549,1.3 -5.024,1.775 -5.479,1.775 -5.802,1.453 -5.802,0.671 v1(-5.283,0.152) -4.682,-0.448 -4.682,-1.328 -5.505,-2.15 ; v3(7.169,-7.168) 6.777,-7.168 6.767,-7.158 7.01,-6.915 6.466,-6.371 6.466,-4.829 v1(7.231,-4.064)
  other v1: -6.909,-12.268 13.157,-11.295 12.357,-11.245 11.607,-11.17 20.932,-11 20.954,-10.233 12.079,-9.459 13.995,-8.295 12.649,-8.23 11.252,-8.199 11.473,-7.569 14.982,-7.017 18.461,-6.254 5.174,-5.658 3.624,-5.533 9.068,-5.495 18.488,-5.286 14.875,-4.995 10.262,-4.572 2.464,-4.432 12.014,-4.305 12.7,-4.089 -1.948,-2.946 1.854,0.635 8.611,0.766 9.347,1.117 8.458,1.492 10.113,1.473 22.631,1.492 7.331,1.549 -0.991,1.727 8.992,2.23 24.816,2.261 7.738,2.312 10.135,2.333 -9.042,2.557 3.581,2.631 9.408,2.921 7.366,2.966 8.255,2.972 15.875,3.4 9.119,3.734 24.907,3.734 8.026,3.802 15.875,4.752 16.95,4.752 24.282,5.207 16.907,5.41 13.987,5.715 -2.134,6.121 23.484,6.807 -2.134,6.883 20.675,7.1 21.475,7.1 22.275,7.1 -6.629,7.192 14.139,7.334 20.693,7.925 21.458,7.925 22.275,7.925 14.042,8.132 -5.442,8.661 -5.049,8.655 18.833,8.653 5.721,8.809 7.169,8.809 8.693,8.808 3.308,8.833 4.157,8.833 -3.448,8.859 -1.848,8.884 -0.146,8.935 0.666,8.935 1.555,8.935 -1.083,8.96 2.394,8.96 14.093,8.961 17.973,9.337 16.294,9.418 14.608,9.476 12.973,9.619
  other v2: 9.743,7.091 9.268,7.792 15.418,7.95 -2.645,8.709 -4.236,8.782 9.48,8.808 4.932,8.833 6.432,8.833 7.911,8.833 15.45,9.386 17.129,9.385 18.833,9.426 13.749,9.57
JTAG_TCKC: k4.8 U10.25 | length 6.4
  Top w0.2: U10.25 6.109,-1.853 7.382,-3.125 7.84,-3.125 8.332,-3.618 8.332,-4.511 8.489,-4.667 k4.8
JTAG_TMSC: k4.6 U10.24 | length 7.2
  Top w0.2: U10.24 5.409,-1.653 7.222,-3.465 7.699,-3.465 7.992,-3.759 7.992,-4.666 8.139,-4.812 k4.6
MAX_INT: R57.1 U6.C1 U10.9 | length 24.5
  Top w0.2: v1(-5.436,2.81) -2.828,5.418 -2.828,7.205 -2.388,7.645 7.518,7.645 7.609,7.555 7.609,7.033 7.603,7.028 7.603,5.492 U10.9 ; v1(-5.232,-1.1) -5.232,-0.54 -5.067,-0.375 U6.C1
  Bottom w0.2: v1(-5.436,2.81) -5.436,2.794 -6.152,2.078 -6.152,-0.181 v1(-5.232,-1.1)
MPU_INT: U10.42
Neta1_1: a1.1 C69.1 | length 3.4
  Top w0.2: a1.1@11.056,12.831 a1.1@11.674,12.214
  Top w1: C69.1 a1.1@11.674,12.214
NetC9_2: C9.2 U4.24 | length 1.1
  Top w0.2: C9.2 19.308,5.084 U4.24 U4.24
NetC14_2: C14.2 U4.21 | length 2.9
  Top w0.2: U4.21 20.598,4.495 20.745,4.642 22.33,4.642 22.618,4.93 22.618,5.176 C14.2
NetC15_2: C15.2 U10.23 | length 2.9
  Top w0.2: C15.2@2.722,0.336 3.331,0.336 3.881,-0.214 U10.23
NetC30_2: C30.2 U8.15 | length 7.3
  Top w0.2: v1(20.381,-5.657) 21.896,-4.143 25.314,-4.143 C30.2
  Bottom w0.2: U8.15@19.296,-6.625 19.768,-6.625 20.381,-6.012 v1(20.381,-5.657)
NetC41_1: C41.1 C42.1 K3.18 R44.1 | length 15.7
  Top w0.2: v1(-0.906,-3.886) C42.1@-0.906,-3.124
  Top w0.254: v1(-1.854,-10.871) -1.854,-10.502 -1.778,-10.426 K3.18
  Bottom w0.2: v1(-5.359,-4.928) -5.359,-4.954 -5.343,-4.97 v1@-5.322,-4.95 ; v1@-5.339,-4.933 v1@-5.327,-4.945 ; v1@-5.216,-4.843 v1@-5.322,-4.95 ; v1(-1.854,-10.871) -1.854,-9.203 -4.094,-6.963 -4.094,-5.965 -4.564,-5.495 -4.777,-5.495 v1@-5.322,-4.95 ; v1@-0.949,-3.912 v1@-0.924,-3.886 ; v1(-0.906,-3.886) v1@-0.924,-3.886 ; v1@-5.327,-4.945 v1@-5.322,-4.95 ; v1@-5.327,-4.945 -4.777,-4.395 -4.28,-4.395 -3.064,-3.179 -3.02,-3.179 -2.645,-3.179 -2.268,-3.556 -1.938,-3.886 v1@-0.924,-3.886
NetC53_1: C53.1 R56.2 U6.C2 | length 1.4
  Top w0.2: C53.1 R56.2 ; U6.C2 -3.734,-0.999 R56.2@-3.708,-1.024
NetC54_2: C54.2 R54.1 U6.B3 | length 5.3
  Top w0.2: U6.B3 -3.073,0.025 -2.794,0.305 -2.37,0.305 -1.989,0.686 C54.2@-1.989,1.295 ; R54.1@-2.936,-1.049 -2.887,-1.049 -2.218,-1.049 -1.888,-0.719 C54.2@-1.888,1.143
NetC69_2: C69.2 C79.2 L8.2
NetK3_10: K3.10 R48.2 | length 2.4
  Top w0.2: R48.2@-6.198,-4.843 -6.198,-5.775 K3.10
NetK3_12: K3.12 R47.2 | length 5.2
  Top w0.2: -5.755,-8.224 -5.755,-9.077 -5.638,-9.195 K3.12 K3.12@-4.778,-9.375
  Top w0.254: R47.2 -7.214,-7.895 -6.692,-7.373 -6.19,-7.373 -5.755,-7.809 -5.755,-8.224
NetK3_13: K3.13 R45.2 | length 2.5
  Top w0.254: R45.2@-6.325,-9.804 -4.478,-9.804 -4.278,-9.605 K3.13
NetL2_1: L2.1 U3.2 | length 4.7
  Top w0.2: L2.1@2.382,-1.819 3.208,-1.819 5.174,-3.785 U3.2 ; L2.1 L2.1@2.585,-1.549
NetL3_2: L3.2 U9.5 | length 2.3
  Top w0.2: L3.2@18.052,-9.882 L3.2 18.587,-10.535 U9.5
NetL4_1: L4.1 U7.2 | length 2.4
  Top w0.2: L4.1 10.985,-12.967 11.208,-12.967 11.607,-12.568 U7.2
NetR42_1: R42.1 U5.3 | length 3.2
  Top w0.2: R42.1 0.462,4.039 1.78,2.721 2.184,2.721 2.46,2.445 U5.3
NetR43_1: R43.1 U5.7 | length 2.4
  Top w0.2: R43.1 0.093,4.725 0.851,4.725 1.235,4.341 1.684,4.341 1.96,4.616 U5.7
RESET_N: C16.2 k4.9 R8.1 U10.35 | length 8.1
  Top w0.2: k4.9@8.873,-7.895 9.02,-8.042 9.817,-8.042 10.312,-7.546 R8.1@10.312,-6.68 ; R8.1 10.622,-6.48 10.622,-5.774 10.82,-5.575 10.82,-3.419 10.999,-3.24 10.999,-2.96 10.999,-2.16 11.109,-2.05 U10.35
RF_N: U10.2
RF_P: C86.2 L8.1 U10.1 | length 1.9
  Top w0.2: C86.2@12.391,6.383 C86.2@12.426,6.417
  Top w0.3: U10.1@11.608,5.271 L8.1@11.608,6.371
  Top w0.4: L8.1 C86.2@12.391,6.383
VBAT+: C12.2 C47.1 K3.4 k4.1 R54.2 R56.1 R57.2 U3.1 U3.8 U3.9 U3.10 U3.11 U3.12 | length 32.8
  Top w0.2: K3.4 -2.278,-5.577 -1.987,-5.286 -1.987,-5.279 -1.906,-5.198 -1.906,-4.819 -1.543,-4.456 -0.656,-4.456 -0.49,-4.29 -0.48,-4.29 C47.1@-0.115,-3.925 ; U3.1 5.893,-4.414 5.918,-4.388 ; 6.477,-5.198 6.489,-5.211 6.489,-6.076 6.268,-6.297 6.268,-7.666 6.644,-8.042 7.258,-8.042 k4.1@7.446,-7.853
  Top w0.3: v1(-0.076,-3.759) 0.158,-3.525 1.276,-3.525 1.446,-3.695 1.446,-3.976 1.811,-4.341 1.811,-4.798 2.353,-5.339 2.353,-6.721 2.87,-7.239 3.759,-7.239 v1(4.216,-6.782)
  Top w0.301: R57.2@-5.267,-2.203 R57.2@-5.232,-2.237 ; R57.2 -5.149,-2.183 -5.149,-2.593 -5.013,-2.73 -4.698,-2.73 -3.957,-3.471 -3.46,-3.471 -2.946,-2.957 -2.946,-2.108 R54.2
  Top w0.451: R56.1@-3.734,-2.108 -2.946,-2.108 -1.826,-2.108 -0.389,-0.671 2.767,-0.671 5.893,-3.797 5.893,-4.414 5.893,-4.75
  Bottom w0.2: v1(4.216,-6.782) 4.973,-6.782 4.925,-6.734 v1(5.131,-6.734)
VDD: C4.2 C5.2 C6.2 C7.2 C8.2 C10.1 C11.2 C22.2 C23.2 C25.1 C33.2 C51.2 C62.2 C71.2 L2.2 L3.1 R8.2 R9.2 R10.2 R41.2 R42.2 R43.2 U3.5 U4.1 U4.3 U4.7 U4.8 U4.22 U4.23 U5.8 U7.1 U7.12 U9.4 U9.6 U10.13 U10.22 U10.34 U10.44 U11.1 U11.2 U11.3 | length 35.6
  Top w0.2: C5.2@-0.99,5.581 C5.2 ; C25.1 0.317,6.401 1.46,5.258 ; U5.8 1.46,5.258 ; v1(2.184,5.613) 1.815,5.613 1.46,5.258 ; C11.2@3.15,-3.714 3.681,-4.245 3.681,-4.626 U3.5 ; v1(3.683,0.762) 4.089,0.762 4.565,0.286 U10.22 ; C33.2@4.293,5.921 4.302,5.912 4.216,5.826 C33.2 ; U10.13@5.256,4.786 U10.13 ; C7.2 10.236,-3.04 10.609,-2.667 U10.34 ; U10.44 12.323,2.8 13.624,2.8 13.741,2.683 13.741,2.449 ; U10.44@12.309,2.857 13.119,2.857 13.537,3.275 14.1,3.275 v1@14.025,3.2 ; R9.2@14.07,2.3 14.589,2.819 C6.2 ; v1@14.072,3.247 v1(14.072,3.277) ; R10.2@16.541,1.308 R10.2@16.743,1.308 ; R10.2@16.776,1.275 R10.2@16.743,1.308 ; v1@17.443,1.308 R10.2@16.743,1.308 ; v1(17.628,2.642) 17.951,2.642 17.993,2.6 18.483,3.09 U4.3 ; C10.1@17.775,3.975 17.9,4.1 U4.1 ; v1(17.831,0.61) 18.746,0.61 19.308,1.172 U4.7 U4.8 ; L3.1 L3.1@18.198,-11.186 ; C51.2 C51.2@19.133,-12.094 ; v1@19.133,-11.315 v1(19.177,-11.272) ; v1(19.667,-9.732) 19.801,-9.732 U9.4 U9.4@20.076,-9.882 ; v1@20.021,4.245 20.091,4.315 20.108,4.315 v1@20.108,4.571 ; C23.2 C22.2
  Top w0.254: C33.2@4.293,5.921 v1(4.293,6.477) ; C33.2 U10.13@5.256,4.786
  Top w0.3: v1(-3.226,3.747) -1.462,3.747 R41.2 R42.2 C5.2@-0.99,5.581 ; v1@20.021,4.245 20.021,4.484 v1@20.108,4.571
  Top w0.4: 1.245,-2.311 2.647,-3.714 C11.2@3.15,-3.714
  Top w0.5: L3.1@18.198,-11.186 U9.6 ; C51.2@19.133,-12.094 v1@19.133,-11.315
  Bottom w0.2: U11.1 U11.3 U11.2
  other v1: 19.077,-12.475 10.659,-12.327 10.707,-11.297 10.711,-10.314 11.353,-6.664 13.331,-5.419 10.262,-3.378 0.051,-2.896 0.94,-2.692 -0.076,-2.149 0.762,-2.044 -0.035,-1.372 0.66,-1.346 17.476,1.275 20.021,4.49 17.856,4.775 20.521,5.215 17.85,5.4 19.95,9.35 20.963,9.35
VDDR: C1.2 C2.2 C3.2 L1.2 U10.45 U10.48 | length 24.4
  Top w0.2: C1.2 L1.2 ; U10.45 12.947,3.286 13.758,4.098 v1(14.15,4.098) ; U10.48 12.309,5.037 v1(12.987,5.715)
  Bottom w0.279: v1(9.042,-4.31) 9.672,-3.68 9.672,-3.134 10.017,-2.789 10.419,-2.789 13.487,0.279 15.402,0.279 15.756,0.634 15.776,0.634 17.156,2.014 17.923,2.014 18.241,2.333 18.241,3.468 17.631,4.078 v1@14.15,4.078 ; 13.476,4.098 v1(14.15,4.098)
  Bottom w0.3: v1(12.987,5.715) 12.987,4.586 13.476,4.098
VIB: U10.36 | length 0.1
  Top w0.2: U10.36 U10.36@11.694,-1.499
VIB+: k4.4 | length 0.2
  Top w0.2: k4.4@7.779,-6.671 7.779,-6.513 k4.4@7.784,-6.508
VIB-: k4.2 | length 0.2
  Top w0.152: k4.2@7.421,-6.358 k4.2
X24M_N: U10.46 Y1.1 | length 7.2
  Top w0.2: U10.46 12.854,3.786 13.843,4.775 14.837,4.775 15.699,5.637 16.014,5.637 16.256,5.879 16.256,7.131 Y1.1@17.05,7.925
X24M_P: U10.47 Y1.3 | length 4.5
  Top w0.2: U10.47 12.873,4.286 13.712,5.125 14.706,5.125 15.373,5.792 Y1.3@15.373,6.648
pads on no net: a1.2 K3.8 K3.11 K3.21 k4.10 k4.12 k4.13 k4.14 U3.6 U4.9 U4.10 U4.11 U4.12 U4.13 U5.10 U6.B2 U7.6 U7.7 U8.1 U8.2 U8.3 U8.4 U8.5 U8.8 U8.9 U8.10 U8.16 U8.17 U8.18 U10.3 U10.4 U10.5 U10.6 U10.7 U10.8 U10.12 U10.18 U10.19 U10.20 U10.21 U10.26 U10.27 U10.28 U10.29 U10.30 U10.31 U10.32 U10.37 U10.38 U10.39 U10.40 U10.41 U10.43 U11.7 U11.10
copper on no net: | length 0.1
  Top w0.2: 20.598,1.539 20.598,1.65

## Polygon pours and split planes (outlines as drawn)
GND on Bottom "Bottom-GND" (solid, pour order 34): -10.536,9.27 10.555,9.271 10.555,3.904 12.731,3.904 12.731,10.05 27.24,10.05 27.24,-16.419 -10.574,-16.419
no net on Bottom "Bottom-No Net" (solid, pour order 18): 4.717,-4.518
GND on Top "Top-GND" (solid, pour order 32): -9.067,9.27 10.235,9.27 10.235,5.779 12.648,5.779 12.648,9.967 26.499,9.967 26.499,-15.974 -9.442,-15.974
no net on Top "Top-No Net" (solid, pour order 38): 21.692,-8.865
GND on Ground Plane (split plane): 32.943,15.516 33.133,15.496 33.53,15.412 33.92,15.266 34.295,15.058 34.638,14.791 34.936,14.473 35.179,14.116 35.378,13.689 35.509,13.2 35.551,12.716 35.551,-15.272 35.544,-15.466 35.524,-15.657 35.44,-16.053 35.295,-16.444 35.087,-16.818 34.819,-17.161 34.501,-17.46 34.144,-17.703 33.717,-17.902 33.228,-18.033 32.744,-18.074 -14.244,-18.074 -14.438,-18.067 -14.629,-18.048 -15.025,-17.963 -15.415,-17.818 -15.79,-17.61 -16.133,-17.343 -16.432,-17.024 -16.675,-16.667 -16.873,-16.241 -17.004,-15.752 -17.046,-15.267 -17.046,12.721 -17.039,12.915 -17.02,13.105 -16.935,13.501 -16.79,13.892 -16.582,14.266 -16.315,14.61 -15.996,14.908 -15.639,15.151 -15.213,15.35 -14.723,15.481 -14.239,15.522 4.36,15.522 -1.829,13.407 -5.686,9.63 10.744,9.686 10.744,4.902 12.471,4.902 12.471,9.692 19.956,9.718 19.865,11.949 19.662,12.001 18.671,12.737 17.632,13.407 17.625,13.741 13.49,15.231 12.9,15.522 32.749,15.522
VDD on Power Plane (split plane): 32.943,15.516 33.133,15.496 33.53,15.412 33.92,15.266 34.295,15.058 34.638,14.791 34.936,14.473 35.179,14.116 35.378,13.689 35.509,13.2 35.551,12.716 35.551,-15.272 35.544,-15.466 35.524,-15.657 35.44,-16.053 35.295,-16.444 35.087,-16.818 34.819,-17.161 34.501,-17.46 34.144,-17.703 33.717,-17.902 33.228,-18.033 32.744,-18.074 -14.244,-18.074 -14.438,-18.067 -14.629,-18.048 -15.025,-17.963 -15.415,-17.818 -15.79,-17.61 -16.133,-17.343 -16.432,-17.024 -16.675,-16.667 -16.873,-16.241 -17.004,-15.752 -17.046,-15.267 -17.046,12.721 -17.039,12.915 -17.02,13.105 -16.935,13.501 -16.79,13.892 -16.582,14.266 -16.315,14.61 -15.996,14.908 -15.639,15.151 -15.213,15.35 -14.723,15.481 -14.239,15.522 5.171,15.522 5.002,15.501 -1.859,13.155 -5.716,9.379 10.592,9.434 10.592,4.394 12.497,4.394 12.497,9.441 19.926,9.466 19.835,11.698 19.632,11.75 18.641,12.486 17.602,13.155 17.595,13.489 13.46,14.98 12.519,15.444 12.079,15.522 32.749,15.522

## Other copper
Top:
  region net VDD: 10.325,-9.285 10.325,-12.767 11.125,-12.767 11.125,-9.285
  rectangle net VDDR: 8.788,-4.978 9.423,-3.632
  rectangle net VDD: -0.457,-3.161 1.651,-1.27
  rectangle net VBAT+: 3.531,-6.787 5.867,-6.254
  rectangle net VDD: 17.55,4 18.15,5.613
  rectangle net GND: 16.615,4.425 17.374,6.807
  rectangle net GND: 15.9,3.45 16.875,5.125
  rectangle net GND: 15.575,2.525 16.175,4.05
  rectangle net GND: 14.85,3.8 16.875,4.495
  rectangle net VDD: 13.925,2.975 13.945,3.575
  rectangle net VDD: 13.75,2 14.775,3.575
  rectangle net VDD: 19.888,3.832 20.252,5.525
  rectangle net VDD: 20.066,4.9 21.375,5.525
  rectangle net VDD: 19.624,3.832 20.252,4.745
  rectangle net VDD: 19.383,8.506 21.375,9.757
  region net NetC69_2: 11.397,8.988 11.99,8.988 11.99,7.125 11.397,7.125
  region net VBAT+: 5.641,-3.916 6.553,-3.916 6.604,-4.54 6.604,-5.644 5.641,-5.644
  region net VBAT+: 5.862,-6.263 5.664,-6.542 5.613,-5.39 5.664,-5.441 6.477,-5.441 6.528,-5.492 6.528,-6.299
  pour cut-out: 21.567,3.826 21.567,1.907 19.196,1.907 19.196,3.847
Ground Plane (plane layer: these items are gaps in the copper):
  rectangle: 10.744,4.902 12.471,10.77
  pour cut-out: -5.686,9.63 -1.829,13.407 5.032,15.752 6.779,15.974 9.985,16.182 11.239,15.929 12.549,15.696 13.49,15.231 17.625,13.741 17.632,13.407 18.671,12.737 19.662,12.001 19.865,11.949 19.956,9.718
  region: 26.67,11.049
  region: 27.788,18.974
  region: -23.343,25.197
Power Plane (plane layer: these items are gaps in the copper):
  rectangle: 10.592,4.394 12.497,10.033
  pour cut-out: -5.716,9.379 -1.859,13.155 5.002,15.501 6.749,15.723 9.955,15.931 11.209,15.677 12.519,15.444 13.46,14.98 17.595,13.489 17.602,13.155 18.641,12.486 19.632,11.75 19.835,11.698 19.926,9.466

## Silkscreen, mask and mechanical layers (free items; w line width, h text height)
Top Overlay:
  text "Flytta - 027" at -11.608,8.915 h1.3
  text "MedEngine GmbH" at -11.557,7.036 h1.3